# EAGLE board MoueRev3 (EAGLE 7.6.0)
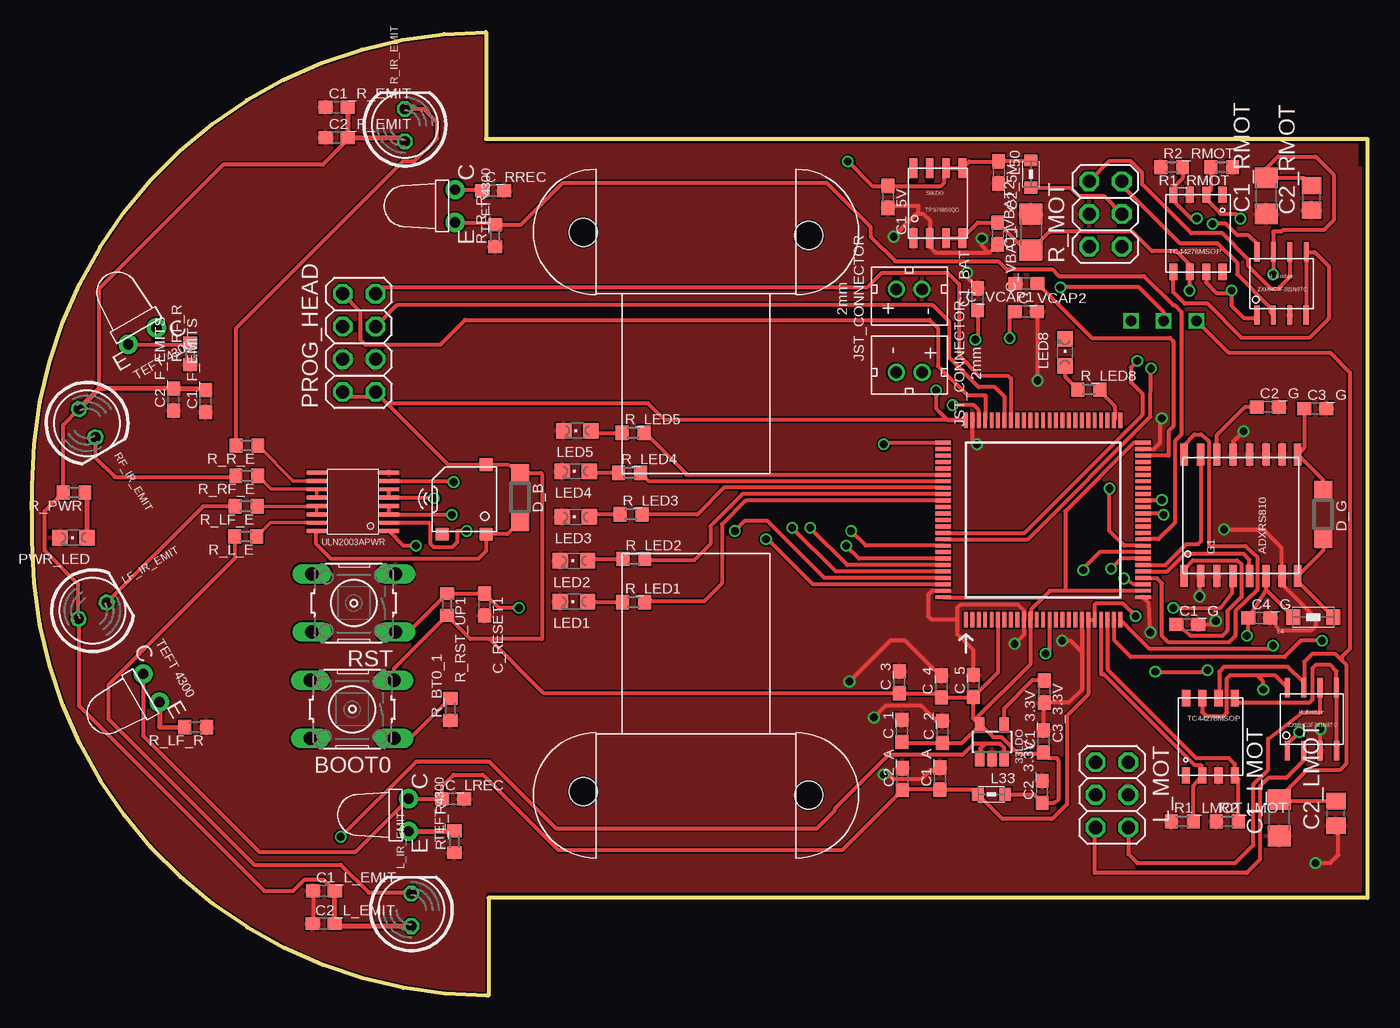
[diagram p0: board, top side]
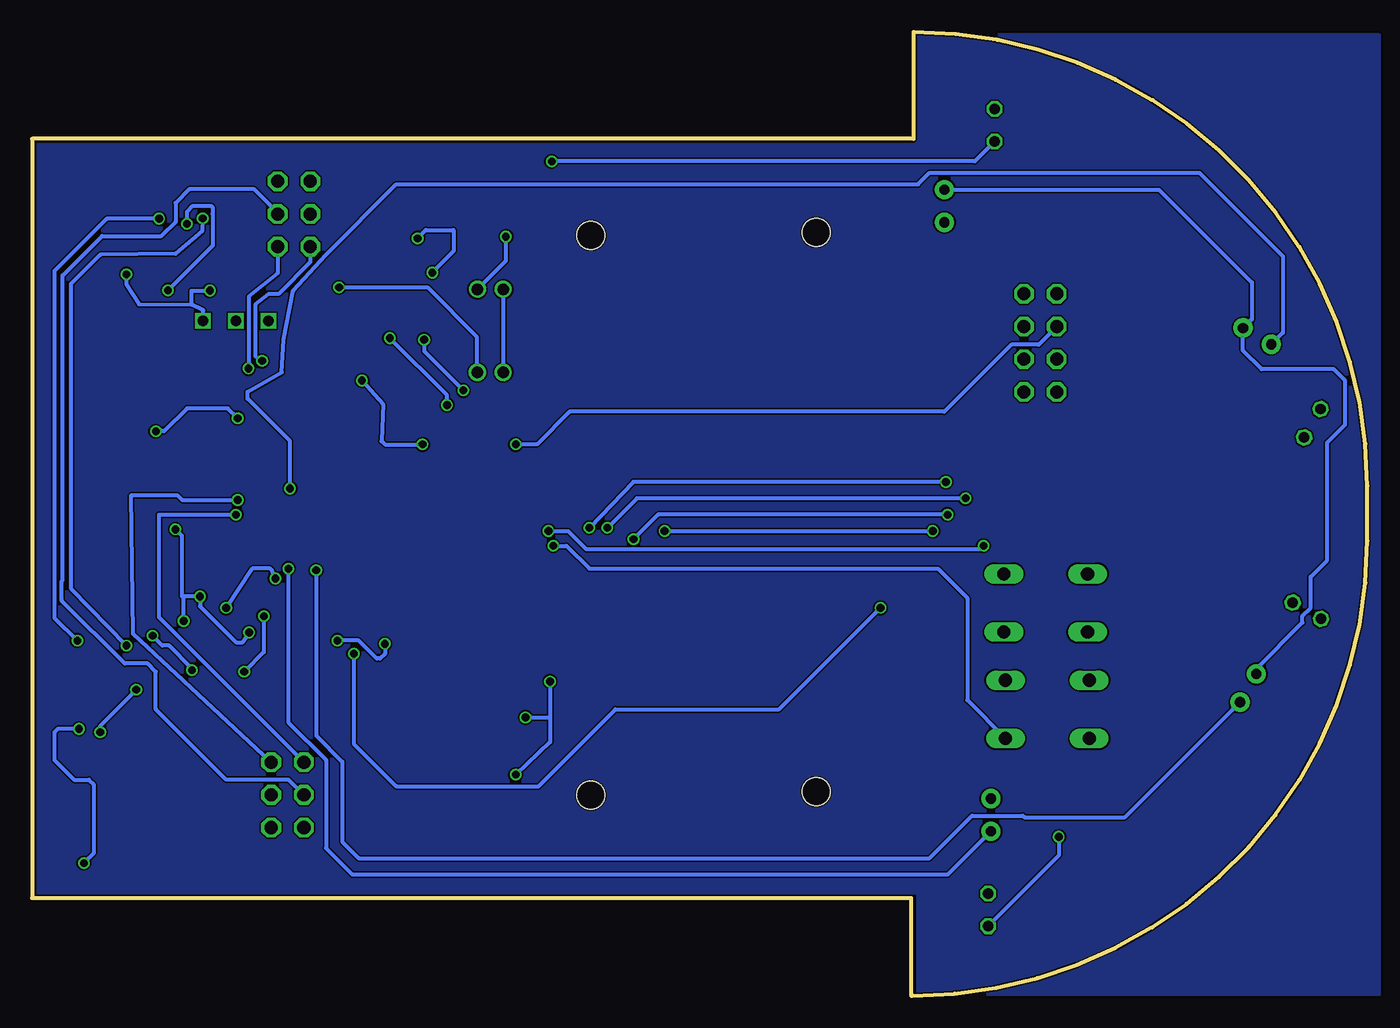
[diagram p1: board, bottom side, seen from below]

Size 103.66 x 74.8 mm. Coordinates in mm from the lower left corner, seen from the top.
Outline: 0,35.31 0,39.57 arc-90 35.23,74.8 35.23,66.52 103.66,66.52 103.66,7.57 35.43,7.57 35.43,0 35.31,0 arc-90 0,35.31
Copper layers (1*16): Top 0.035mm / dielectric 1.5mm / Bottom 0.035mm
Design rules "default *": minimum track width 5mil, minimum drill 20mil, track to track 5mil, track to pad 5mil, pad to pad 5mil, via to via 5mil, smd to smd 5mil, copper to edge 5mil, drill to drill 5mil, minimum pad ring 5mil, minimum via ring 5mil, stop-mask expansion 4mil, vias tented up to drill 0mil, thermal gap 5mil

## Footprints (pad centres in the part's own frame; a part is rotated, then mirrored left to right if it is on the bottom)
SOT23-DBV = smd 0.75 x 1.2: 1 -0.95,-1.3; 2 0,-1.3; 3 0.95,-1.3; 4 0.95,1.3; 5 -0.95,1.3
8-SOIC(SMT) = smd 0.6 x 1.55: EN -0.635,-2.7; GND -1.905,-2.7; IN1 0.635,-2.7; IN2 1.905,-2.7; NC -0.635,2.7; OUT1 1.905,2.7; OUT2 0.635,2.7; PG -1.905,2.7
B3F-10XX = drill 1.016 long: 1 -3.251,2.261; 2 3.251,2.261; 3 -3.251,-2.261; 4 3.251,-2.261
C0603 = smd 1.1 x 1: 1 -0.85,0; 2 0.85,0
C1206 = smd 1.6 x 1.8: 1 -1.4,0; 2 1.4,0
C0805 = smd 1.3 x 1.5: 1 -0.95,0; 2 0.95,0
SOD123 = smd 1.4 x 1.4: A 1.9,0; C -1.9,0
SOIC-16 = smd 1.691 x 0.572: 1 -4.72,4.39; 2 -4.72,3.12; 3 -4.72,1.85; 4 -4.72,0.58; 5 -4.72,-0.69; 6 -4.72,-1.96; 7 -4.72,-3.23; 8 -4.72,-4.43; 9 4.72,-4.43; 10 4.72,-3.23; 11 4.72,-1.96; 12 4.72,-0.69; 13 4.72,0.58; 14 4.72,1.85; 15 4.72,3.12; 16 4.72,4.39
8-SOIC = smd 0.4 x 1.5: N1D/P1D -0.635,-2.45; N1G -1.905,-2.45; N2D/P2D 0.635,2.45; P1G -1.905,2.45; P1S/PS2 -0.635,2.45; P2G 1.905,2.45 | smd 0.42 x 1.5: N1S/N2S 0.635,-2.45; N2G 1.905,-2.45
WE-MI_1206 = smd 1.1 x 1.2: 1 -1.55,0; 2 1.55,0
WE-MI_0805 = smd 0.9 x 1: 1 -1.05,0; 2 1.05,0
LED5MM = drill 0.813 octagon: A -1.27,0; K 1.27,0
2X03 = drill 1.016 octagon: 1 -2.54,-1.27; 2 -2.54,1.27; 3 0,-1.27; 4 0,1.27; 5 2.54,-1.27; 6 2.54,1.27
RECEIVER = drill 0.8 pad 1.5: C 1.27,-0.5; E -1.27,-0.5
CHIPLED_0805 = smd 1.2 x 1.2: A 0,-1.05; C 0,1.05
TC44278MSOP = smd 0.635 x 1.27: GND 0.635,-3; IN_A -0.635,-3; IN_B 1.905,-3; NC1 -1.905,-3; OUT_A -0.635,3; OUT_B 1.905,3; VDD 0.635,3 | smd 0.66 x 1.27: NC2 -1.905,3
2X04 = drill 1.016 octagon: 1 -3.81,-1.27; 2 -3.81,1.27; 3 -1.27,-1.27; 4 -1.27,1.27; 5 1.27,-1.27; 6 1.27,1.27; 7 3.81,-1.27; 8 3.81,1.27
T212031 = drill 0.8 square: 1 0,2.54; 2 0,0; 3 0,-2.54
R0603 = smd 1 x 1.1: 1 -0.85,0; 2 0.85,0
SMT-0540-S-R = smd 1 x 1: + 1.7,-2.7; - 1.7,2.7; M -1.7,-2.7
MOTOR_MOUNT = hole 2.2: -8.75,-1.6; 8.75,-1.85
LQFP100 = smd 1.2 x 0.3: 1 -7.75,6; 2 -7.75,5.5; 3 -7.75,5; 4 -7.75,4.5; 5 -7.75,4; 6 -7.75,3.5; 7 -7.75,3; 8 -7.75,2.5; 9 -7.75,2; 10 -7.75,1.5; 11 -7.75,1; 12 -7.75,0.5; 13 -7.75,0; 14 -7.75,-0.5; 15 -7.75,-1; 16 -7.75,-1.5; 17 -7.75,-2; 18 -7.75,-2.5; 19 -7.75,-3; 20 -7.75,-3.5; 21 -7.75,-4; 22 -7.75,-4.5; 23 -7.75,-5; 24 -7.75,-5.5; 25 -7.75,-6; 51 7.75,-6; 52 7.75,-5.5; 53 7.75,-5; 54 7.75,-4.5; 55 7.75,-4; 56 7.75,-3.5; 57 7.75,-3; 58 7.75,-2.5; 59 7.75,-2; 60 7.75,-1.5; 61 7.75,-1; 62 7.75,-0.5; 63 7.75,0; 64 7.75,0.5; 65 7.75,1; 66 7.75,1.5; 67 7.75,2; 68 7.75,2.5; 69 7.75,3; 70 7.75,3.5; 71 7.75,4; 72 7.75,4.5; 73 7.75,5; 74 7.75,5.5; 75 7.75,6 | smd 0.3 x 1.2: 26 -6,-7.75; 27 -5.5,-7.75; 28 -5,-7.75; 29 -4.5,-7.75; 30 -4,-7.75; 31 -3.5,-7.75; 32 -3,-7.75; 33 -2.5,-7.75; 34 -2,-7.75; 35 -1.5,-7.75; 36 -1,-7.75; 37 -0.5,-7.75; 38 0,-7.75; 39 0.5,-7.75; 40 1,-7.75; 41 1.5,-7.75; 42 2,-7.75; 43 2.5,-7.75; 44 3,-7.75; 45 3.5,-7.75; 46 4,-7.75; 47 4.5,-7.75; 48 5,-7.75; 49 5.5,-7.75; 50 6,-7.75; 76 6,7.75; 77 5.5,7.75; 78 5,7.75; 79 4.5,7.75; 80 4,7.75; 81 3.5,7.75; 82 3,7.75; 83 2.5,7.75; 84 2,7.75; 85 1.5,7.75; 86 1,7.75; 87 0.5,7.75; 88 0,7.75; 89 -0.5,7.75; 90 -1,7.75; 91 -1.5,7.75; 92 -2,7.75; 93 -2.5,7.75; 94 -3,7.75; 95 -3.5,7.75; 96 -4,7.75; 97 -4.5,7.75; 98 -5,7.75; 99 -5.5,7.75; 100 -6,7.75
JST_CONNECTOR_FEMALE = drill 0.889: + 0,1; - 0,-1
ULN2003APWR = smd 1.55 x 0.3: 1B -2.8,2.275; 1C 2.8,2.275; 2B -2.8,1.625; 2C 2.8,1.625; 3B -2.8,0.975; 3C 2.8,0.975; 4B -2.8,0.325; 4C 2.8,0.325; 5B -2.8,-0.325; 5C 2.8,-0.325; 6B -2.8,-0.975; 6C 2.8,-0.975; 7B -2.8,-1.625; 7C 2.8,-1.625; COM 2.8,-2.275; GND -2.8,-2.275

## Placement (x,y rotation side)
33LDO  TPS73633DBVR  [SOT23-DBV]  74.52,19.7 0 top
50LDO  TPS76850QD  [8-SOIC(SMT)]  70.32,61.53 0 top
BOOT0  [B3F-10XX]  24.84,22.22 180 top
C1_3.3V  10uF  [C0603]  78.52,19.74 90 top
C1_5V  100uF  [C0603]  66.45,62.02 270 top
C1_A  1uF  [C0603]  70.48,16.84 90 top
C1_BAT  4.7uF  [C0603]  73.41,54.07 90 top
C1_F_EMITS  4.7uF  [C0603]  13.47,46.16 90 top
C1_G  1uF  [C0603]  89.67,28.82 0 top
C1_L_EMIT  4.7uF  [C0603]  22.65,8.12 0 top
C1_LMOT  100uF  [C1206]  96.83,13.8 90 top
C1_R_EMIT  4.7uF  [C0603]  23.64,68.99 0 top
C1_RMOT  100uF  [C1206]  95.82,62.09 90 top
C2_3.3V  .1uF  [C0603]  78.41,15.82 90 top
C2_5V  .1uF  [C0603]  75.03,63.91 270 top
C2_A  100nF  [C0603]  67.56,16.81 90 top
C2_F_EMITS  .1uF  [C0603]  10.97,46.27 90 top
C2_G  1uF  [C0603]  95.92,45.71 0 top
C2_L_EMIT  .1uF  [C0603]  22.64,5.59 0 top
C2_LMOT  .1uF  [C0805]  101.22,14.14 90 top
C2_R_EMIT  .1 uF  [C0603]  23.65,66.62 0 top
C2_RMOT  .1uF  [C0805]  99.32,61.93 90 top
C3_3.3V  100nF  [C0603]  78.59,23.6 270 top
C3_G  100nF  [C0603]  99.61,45.58 0 top
C4_G  1uF  [C0603]  95.28,29.33 0 top
C_1  100nF  [C0603]  67.53,20.55 90 top
C_2  100nF  [C0603]  70.66,20.47 90 top
C_3  100nF  [C0603]  67.32,24.33 90 top
C_4  100nF  [C0603]  70.58,23.99 90 top
C_5  100nF  [C0603]  73.08,24.04 90 top
C_LREC  0.1uF  [C0603]  32.67,15.27 0 top
C_RESET1  0.1 uF  [C0603]  35.13,30.35 270 top
C_RREC  0.1 uF  [C0603]  35.8,62.5 0 top
C_VBAT1  .1uF  [C0603]  74.96,59.17 270 top
C_VBAT2  100uF  [C1206]  77.55,59.28 90 top
C_VCAP1  2.2uF  [C0603]  77.18,55.28 180 top
C_VCAP2  2.2uF  [C0603]  77.14,53.09 0 top
D_B  25V  [SOD123]  37.87,38.69 270 top
D_G  >24V  [SOD123]  100.25,37.37 270 top
G1  ADXRS810  [SOIC-16]  93.82,37.29 90 top
HB_L  ZXMHC3F381N8TC  [8-SOIC]  99.35,21.46 0 top
HB_R  ZXMHC3F381N8TC  [8-SOIC]  97,55.29 0 top
L4  560uH  [WE-MI_1206]  99.47,29.39 0 top
L33  10uH  [WE-MI_0805]  74.48,15.63 180 top
L50  10uH  [WE-MI_0805]  77.54,63.78 270 top
L_IR_EMIT  5mm  [LED5MM]  29.44,6.65 90 top
L_MOT  [2X03]  83.83,15.58 270 top
L_REC  RECEIVER  [RECEIVER]  28.72,14.02 90 top
LED1  [CHIPLED_0805]  42.07,30.6 90 top
LED2  [CHIPLED_0805]  42.07,33.75 90 top
LED3  [CHIPLED_0805]  42.19,37.17 90 top
LED4  [CHIPLED_0805]  42.19,40.71 90 top
LED5  [CHIPLED_0805]  42.32,43.87 90 top
LED8  [CHIPLED_0805]  80.19,49.94 0 top
LF_IR_EMIT  5mm  [LED5MM]  4.69,29.88 30 top
LF_REC  RECEIVER  [RECEIVER]  8.81,23.62 120 top
MOS_L  TC44278MSOP  [TC44278MSOP]  91.47,20.09 0 top
MOS_R  TC44278MSOP  [TC44278MSOP]  90.51,59.19 180 top
PROG_HEAD  [2X04]  25.38,50.68 90 top
PWR_LED  [CHIPLED_0805]  3.21,35.56 90 top
PWR_SWITCH  T212031  [T212031]  87.85,52.39 90 top
R1_LMOT  47k  [R0603]  89.3,13.52 0 top
R1_RMOT  47k  [R0603]  92.35,64.32 180 top
R2_LMOT  47k  [R0603]  92.8,13.52 0 top
R2_RMOT  47k  [R0603]  88.47,64.33 0 top
R_BT0_1  47k  [R0603]  32.46,22.22 90 top
R_IR_EMIT  5mm  [LED5MM]  28.94,67.58 90 top
R_L_E  6 ohm  [R0603]  16.58,35.65 180 top
R_L_R  1.8k ohm  [R0603]  32.78,11.95 90 top
R_LED1  1k  [R0603]  46.68,30.54 0 top
R_LED2  1k  [R0603]  46.71,33.89 0 top
R_LED3  1k  [R0603]  46.48,37.37 0 top
R_LED4  1k  [R0603]  46.37,40.59 0 top
R_LED5  1k  [R0603]  46.66,43.69 0 top
R_LED8  1k  [R0603]  82.04,47.07 0 top
R_LF_E  10 ohm  [R0603]  16.62,37.99 180 top
R_LF_R  1.8k ohm  [R0603]  12.69,20.84 180 top
R_MOT  [2X03]  83.33,60.69 90 top
R_PWR  200 Ohm  [R0603]  3.25,39.06 180 top
R_R_E  6 ohm  [R0603]  16.68,42.71 180 top
R_R_R  1.8k ohm  [R0603]  35.93,59.02 90 top
R_REC  RECEIVER  [RECEIVER]  32.33,61.3 90 top
R_RF_E  10 ohm  [R0603]  16.67,40.36 180 top
R_RF_R  1.8k ohm  [R0603]  12.28,49.83 90 top
R_RST_UP1  47k  [R0603]  32.21,30.35 270 top
RF_IR_EMIT  5mm  [LED5MM]  4.26,44.44 300 top
RF_REC  RECEIVER  [RECEIVER]  8.31,51.63 30 top
RST  [B3F-10XX]  24.97,30.48 180 top
SPK1  SMT-0540-S-R  [SMT-0540-S-R]  33.54,38.52 0 top
U$1  MOTOR  [MOTOR_MOUNT]  51.53,57.42 180 top
U$2  MOTOR  [MOTOR_MOUNT]  51.53,17.42 0 top
U$3  STM32F746VG  [LQFP100]  78.49,36.93 90 top
U$7  JST_CONNECTOR_FEMALE  [JST_CONNECTOR_FEMALE]  68.09,48.39 270 top
U$8  JST_CONNECTOR_FEMALE  [JST_CONNECTOR_FEMALE]  68.09,54.85 90 top
U$9  ULN2003APWR  [ULN2003APWR]  24.9,38.34 180 top

## Library data of the parts
33LDO = TPSRegulators; AVAILABILITY: Good; DESCRIPTION: Single Output LDO, 400mA, Adj.(1.2 to 5.5V), Cap free, Low Noise, Reverse Current Protection 5-SOT-23 -40 to 125; MF: Texas Instruments; MP: TPS73633DBVR; PACKAGE: SOT-23 Texas Instruments; PRICE: 1.34 USD
50LDO = TPSRegulators
BOOT0 RST = switch-omron; MPN: B3F-1000; OC_FARNELL: 176432; OC_NEWARK: 36M3542
C1_3.3V C1_5V C1_F_EMITS C1_L_EMIT C1_R_EMIT C2_3.3V C2_5V C2_F_EMITS C2_L_EMIT C2_R_EMIT C3_3.3V C_LREC C_RESET1 C_RREC C_VBAT1 C_VBAT2 R1_LMOT R1_RMOT R2_LMOT R2_RMOT R_BT0_1 R_L_E R_L_R R_LED1-R_LED5 R_LED8 R_LF_E R_LF_R R_PWR R_R_E R_R_R R_RF_E R_RF_R R_RST_UP1 = resistor
C1_A C1_BAT C1_G C1_LMOT C1_RMOT C2_A C2_G C2_LMOT C2_RMOT C3_G C4_G C_1-C_5 C_VCAP1 C_VCAP2 = rcl
D_B D_G = diode
G1 = gyroscope
HB_L HB_R = MMHbridge
L4 L33 L50 = EagleLibrary_Wuerth_Elektronik_eiSos_rev16a
L_IR_EMIT LED1-LED5 LED8 LF_IR_EMIT PWR_LED R_IR_EMIT RF_IR_EMIT = led
L_MOT PROG_HEAD R_MOT = pinhead
L_REC LF_REC R_REC RF_REC = sfh4550 & teft4300
MOS_L MOS_R = MMmosfet
PWR_SWITCH = GCswitch
SPK1 = SMT-0540-S-R; AVAILABILITY: Good; DESCRIPTION: Audio Indicator Transducer Electromagnetic 3Vp-p 100mA Solder Pad 2Vp-p 3500Hz to 4500Hz Surface Mount; MF: PUI Audio; MP: SMT-0540-S-R; PACKAGE: None; PRICE: 2.42 USD
U$1 U$2 = mounts
U$3 = MCU
U$7 U$8 = JST_CONNECTOR_FEMALE. through hole
U$9 = ULN2003APWR

## Nets
3.3V: 33LDO.5 BOOT0.3 C1_3.3V.1 C1_BAT.1 C2_3.3V.1 C_1.1 C_2.1 C_3.1 C_4.1 C_5.1 D_B.C L33.1 PROG_HEAD.1 PROG_HEAD.2 R_RST_UP1.2 SPK1.- U$3.6 U$3.11 U$3.27 U$3.50 U$3.75 U$3.100
5V: 33LDO.1 33LDO.3 50LDO.OUT1 50LDO.OUT2 C1_5V.1 C1_F_EMITS.2 C1_L_EMIT.2 C1_R_EMIT.2 C2_5V.1 C2_F_EMITS.2 C2_L_EMIT.2 C2_R_EMIT.2 L50.1 L_IR_EMIT.A LF_IR_EMIT.A R_IR_EMIT.A R_PWR.2 RF_IR_EMIT.A
A3.3V: C1_A.1 C2_A.1 C4_G.1 C_LREC.1 C_RREC.1 G1.6 L4.1 L33.2 L_REC.C LF_REC.C R_REC.C RF_REC.C U$3.20 U$3.21
A5.0V: L50.2 L_MOT.3 R_MOT.3
BOOT0: BOOT0.1 R_BT0_1.2 U$3.94
BUZZER: U$3.92 U$9.1B
G_CS: G1.4 U$3.28
G_MISO: G1.5 U$3.30
G_MOSI: G1.15 U$3.31
G_SCLK: G1.16 U$3.29
L_EMITTER: U$3.96 U$9.5B U$9.6B
LED1: R_LED1.2 U$3.85
LED2: R_LED2.2 U$3.84
LED3: R_LED3.2 U$3.83
LED4: R_LED4.2 U$3.82
LED5: R_LED5.2 U$3.81
LED9: R_LED8.2 U$3.52
LEFT_REC: L_REC.E R_L_R.2 U$3.32
LENCA: L_MOT.1 U$3.39
LENCB: L_MOT.2 U$3.41
LF_EMITTER: U$3.95 U$9.7B
LF_REC: LF_REC.E R_LF_R.2 U$3.33
LPWMA: MOS_L.IN_A R1_LMOT.2 U$3.22
LPWMB: MOS_L.IN_B R2_LMOT.2 U$3.23
N$1: PWR_LED.A R_PWR.1
N$2: 33LDO.4 C3_3.3V.1
N$3: 33LDO.2 50LDO.EN 50LDO.GND C1_3.3V.2 C1_5V.2 C1_A.2 C1_BAT.2 C1_F_EMITS.1 C1_G.2 C1_L_EMIT.1 C1_LMOT.1 C1_R_EMIT.1 C1_RMOT.1 C2_3.3V.2 C2_5V.2 C2_A.2 C2_F_EMITS.1 C2_G.2 C2_L_EMIT.1 C2_LMOT.1 C2_R_EMIT.1 C2_RMOT.1 C3_3.3V.2 C3_G.2 C4_G.2 C_1.2 C_2.2 C_3.2 C_4.2 C_5.2 C_LREC.2 C_RESET1.2 C_RREC.2 C_VBAT1.2 C_VBAT2.2 C_VCAP1.2 C_VCAP2.2 G1.2 G1.3 G1.7 G1.10 G1.11 G1.12 G1.13 HB_L.N1S/N2S HB_R.N1S/N2S L_MOT.4 LED1.C LED2.C LED3.C LED4.C LED5.C MOS_L.GND MOS_R.GND PROG_HEAD.3 PROG_HEAD.4 PWR_LED.C R1_LMOT.1 R1_RMOT.1 R2_LMOT.1 R2_RMOT.1 R_BT0_1.1 R_L_R.1 R_LF_R.1 R_MOT.4 R_R_R.1 R_RF_R.1 RST.3 U$3.10 U$3.19 U$3.26 U$3.49 U$3.74 U$3.99 U$8.- U$9.GND
N$4: R_L_E.1 U$9.2C
N$5: HB_L.N1G HB_L.P1G MOS_L.OUT_A
N$6: HB_L.N2G HB_L.P2G MOS_L.OUT_B
N$7: HB_R.N1G HB_R.P1G MOS_R.OUT_A
N$8: HB_L.N1D/P1D L_MOT.5
N$9: U$7.- U$8.+
N$10: C1_G.1 G1.1
N$11: HB_L.N2D/P2D L_MOT.6
N$12: LED8.C
N$13: R_R_E.1 U$9.7C
N$14: D_G.A G1.8 L4.2
N$16: LED8.A R_LED8.1
N$18: HB_R.N2G HB_R.P2G MOS_R.OUT_B
N$19: HB_R.N1D/P1D R_MOT.5
N$20: C3_G.1 D_G.C G1.9
N$21: HB_R.N2D/P2D R_MOT.6
N$23: R_RF_E.2 RF_IR_EMIT.K
N$24: R_LF_E.1 U$9.3C U$9.4C
N$25: R_IR_EMIT.K R_R_E.2
N$26: L_IR_EMIT.K R_L_E.2
N$27: R_RF_E.1 U$9.5C U$9.6C
N$28: LF_IR_EMIT.K R_LF_E.2
N$29: D_B.A SPK1.+ U$9.1C
N$31: PWR_SWITCH.2 U$7.+
N$35: C2_G.1 G1.14
N$40: LED1.A R_LED1.1
N$41: LED2.A R_LED2.1
N$42: LED3.A R_LED3.1
N$43: LED4.A R_LED4.1
N$44: LED5.A R_LED5.1
N$56: C_VCAP2.1 U$3.73
N$57: C_VCAP1.1 U$3.48
R_EMITTER: U$3.98 U$9.3B U$9.4B
RENCA: R_MOT.1 U$3.91
RENCB: R_MOT.2 U$3.90
RESET: C_RESET1.1 R_RST_UP1.1 RST.1 U$3.14
RF_EMITTER: U$3.97 U$9.2B
RF_REC: R_RF_R.2 RF_REC.E U$3.34
RIGHT_REC: R_R_R.2 R_REC.E U$3.35
RPWMA: MOS_R.IN_A R1_RMOT.2 U$3.24
RPWMB: MOS_R.IN_B R2_RMOT.2 U$3.25
RX: PROG_HEAD.5 U$3.69
SW1: U$3.63
SW2: U$3.62
SWCLK: PROG_HEAD.6 U$3.76
SWDIO: PROG_HEAD.8 U$3.72
TX: PROG_HEAD.7 U$3.68
V_BAT: 50LDO.IN1 50LDO.IN2 C1_LMOT.2 C1_RMOT.2 C2_LMOT.2 C2_RMOT.2 C_VBAT1.1 C_VBAT2.1 HB_L.P1S/PS2 HB_R.P1S/PS2 MOS_L.VDD MOS_R.VDD PWR_SWITCH.3

## Tracks (layer width: path | path; a pad name or v marks a point on that pad's centre or on a via)
3.3V  (via drill 0.6)
  Top 0.305: 27.02,46.5 PROG_HEAD.1 27.54,45.97 47.83,45.97 49.12,44.68 U$3.75 72.46,44.7 71.07,44.7 70.18,45.59 v70.18,46.99 | 27.02,46.5 32.3,41.22 SPK1.- 36.98,41.22 D_B.C 39.5,40.59 39.57,40.51 39.57,27.69 35.51,27.69 | 27.02,46.5 24.48,46.5 PROG_HEAD.2 24.21,46.86 | C_1.1 67.61,19.62 C_2.1 72.2,19.62 33LDO.5 | L33.1 77.75,15.63 C2_3.3V.1 79.31,14.97 79.71,15.24 79.71,18.16 79.58,18.41 78.99,18.41 C1_3.3V.1 78.43,18.8 76.53,18.8 75.26,20.07 74.63,20.07 73.7,21 33LDO.5 | 73.03,23.14 C_4.1 70.25,23.48 C_3.1 39.72,23.48 35.51,27.69 | 73.03,23.14 C_5.1 74.99,25.1 U$3.6 | 73.03,23.14 73.03,21.53 73.17,21.4 | 73.17,21.4 33LDO.5 | 73.17,21.4 77.49,25.72 U$3.11 77.55,29.24 77.55,29.97 78.5,30.93 | U$3.27 80.21,31.43 | 80.21,31.43 79,31.43 78.5,30.93 | BOOT0.3 28.09,25.39 R_RST_UP1.2 34.02,27.69 35.51,27.69 | U$3.50 85.55,42.93 80.21,37.59 80.21,31.43 | U$3.100 78.5,30.93 | C1_BAT.1 73.41,51.11 v73.23,50.93
  Bottom 0.305: v73.23,50.93 73.23,50.04 v70.18,46.99
5V  (via drill 0.6)
  Top 0.305: RF_IR_EMIT.A 2.4,44.31 R_PWR.2 0.97,37.62 0.97,34.54 3.59,31.92 LF_IR_EMIT.A 3.63,29.2 3.63,22.48 17.99,8.12 20.26,8.12 21.16,9.02 22.6,9.02 C1_L_EMIT.2 | C2_R_EMIT.2 24.49,66.45 22.56,64.52 14.81,64.52 5.16,54.86 5.16,47.37 5.41,47.12 | L50.1 75.1,64.83 C2_5V.1 72.76,64.76 50LDO.OUT1 50LDO.OUT2 70.82,64.09 70.82,63.12 70.56,62.87 C1_5V.1 65.23,62.87 v63.32,64.77 | 33LDO.3 75.47,19.22 75.13,19.56 73.99,19.56 | 73.99,19.56 73.61,19.18 73.61,18.43 33LDO.1 | 73.99,19.56 73.1,19.56 72.21,18.67 66.5,18.67 62.31,14.48 62.31,14.35 60.91,12.95 40.72,12.95 35.51,18.16 29.79,18.16 v23.95,12.32
  Top 0.406: L_IR_EMIT.A 23.69,5.38 C2_L_EMIT.2 23.49,8.1 C1_L_EMIT.2 | C1_F_EMITS.2 13.36,47.12 C2_F_EMITS.2 5.41,47.12 5.21,47.12 RF_IR_EMIT.A | C1_R_EMIT.2 C2_R_EMIT.2 28.64,66.62 R_IR_EMIT.A
  Bottom 0.305: R_IR_EMIT.A 30.48,64.77 v63.32,64.77 | v23.95,12.32 23.95,10.87 L_IR_EMIT.A
A3.3V  (via drill 0.6)
  Top 0.305: R_REC.C 34.87,62.57 C_RREC.1 | L4.1 95.78,31.53 G1.6 95.78,31.44 C4_G.1 94.44,27.94 v94.31,27.94 | LF_REC.C 8.61,20.17 17.6,11.18 25.11,11.18 L_REC.C 31.8,15.29 C_LREC.1 31.82,16.25 32.72,17.14 35,17.14 40.84,11.3 62.9,11.3 C2_A.1 67.59,15.99 C1_A.1 73.06,15.99 L33.2 75.34,13.72 79.2,13.72 80.34,14.86 80.34,21.72 81.99,23.36 U$3.20 U$3.21 82.49,30.34 82.63,30.48 84.66,30.48 v85.67,29.46 | v87.2,25.15 91.14,25.15 v91.26,25.27
  Bottom 0.305: R_REC.C 16.17,62.57 8.97,55.37 8.97,52.52 RF_REC.C 9.66,50.09 8.2,48.64 2.62,48.64 1.73,47.75 1.73,44.32 3.12,42.93 3.12,33.78 4.39,32.51 4.39,30.1 5.03,29.46 5.03,28.96 8.61,25.37 LF_REC.C | v85.67,29.46 85.67,26.67 v87.2,25.15 | v91.26,25.27 91.26,25.4 93.04,27.18 93.55,27.18 v94.31,27.94
A5.0V
  Top 0.305: L50.2 80.6,62.73 81.23,62.1 83.19,62.1 R_MOT.3
  Bottom 0.305: L_MOT.3 83.75,16.76 88.6,16.76 94.06,22.22 94.06,25.15 94.69,25.78 96.47,25.78 101.35,30.66 101.35,32.21 101.3,32.26 101.3,55.91 98.22,58.98 93.62,58.98 92.53,60.07 92.53,61.54 91.47,62.61 86.41,62.61 84.6,60.8 R_MOT.3
BOOT0  (via drill 0.6)
  Top 0.305: BOOT0.1 29.35,19.96 R_BT0_1.2 | U$3.94 64.19,33.93 v63.2,34.92
  Bottom 0.305: v63.2,34.92 62.18,34.92 60.4,33.15 33.35,33.15 31.06,30.86 31.06,22.94 BOOT0.1
BUZZER  (via drill 0.6)
  Top 0.305: U$3.92 64.72,34.93 v63.58,36.07 | v29.79,34.92 28.84,34.92 U$9.1B
  Bottom 0.305: v63.58,36.07 62.05,36.07 60.66,34.67 30.05,34.67 v29.79,34.92
G_CS  (via drill 0.6)
  Top 0.305: U$3.28 85.5,31.93 v84.79,32.39 | v88.6,30.1 92.28,30.1 93.17,31.24 93.17,32.5 G1.4
  Bottom 0.305: v84.79,32.39 85.04,33.02 85.17,33.15 86.56,33.15 v88.6,30.1
G_MISO
  Top 0.305: G1.5 94.51,33.83 94.06,34.29 89.48,34.29 88.09,32.89 86.27,32.89 U$3.30
G_MOSI
  Top 0.305: U$3.31 87.99,33.43 89.61,35.05 90.5,35.05 90.75,35.31 90.75,41.96 G1.15
G_SCLK
  Top 0.305: G1.16 89.43,42.75 90.25,43.56 90.75,43.56 91.34,43.05 91.36,40.28 91.36,34.95 91.39,34.92 94.18,34.92 95.12,34.04 95.12,31.5 93.42,29.85 93.42,27.94 92.91,27.43 88.21,27.43 87.71,27.94 87.71,32 87.33,32.39 86.28,32.39 U$3.29
GND
  pour Bottom: -0.94,74.55 35,74.55 35,66.04 103.2,66.04 103.2,8 34.87,8 34.87,0.13 -0.94,0.13
L_EMITTER  (via drill 0.6)
  Top 0.305: U$9.6B U$9.5B 31.13,38.67 v31.19,38.61 | U$3.96 62.4,32.93 v59,36.32
  Bottom 0.305: v31.19,38.61 56.72,38.61 v59,36.32
LED1
  Top 0.305: U$3.85 55.4,38.43 53.54,36.58 53.54,32 52.15,30.61 47.59,30.61 R_LED1.2
LED2
  Top 0.305: U$3.84 55.13,38.93 52.65,36.45 52.65,35.05 51.38,33.78 47.67,33.78 R_LED2.2
LED3
  Top 0.305: U$3.83 53.73,39.43 51.64,37.34 47.37,37.34 R_LED3.2
LED4
  Top 0.305: U$3.82 47.89,39.93 R_LED4.2
LED5
  Top 0.305: U$3.81 50.77,40.43 50.77,40.52 47.96,43.33 47.87,43.33 R_LED5.2
LED9
  Top 0.305: R_LED8.2 82.89,46.93 84.05,45.77 84.05,44.74 U$3.52
LEFT_REC  (via drill 0.6)
  Top 0.305: U$3.32 84.55,33.93 v83.77,33.15
  Top 0.406: L_REC.E 32.74,12.75 R_L_R.2
  Bottom 0.305: v83.77,33.15 83.77,21.21 80.85,18.29 80.85,11.43 78.82,9.4 32.58,9.4 L_REC.E
LENCA  (via drill 0.6)
  Top 0.305: v87.83,37.34 87.54,37.43 U$3.39
  Bottom 0.305: L_MOT.1 93.8,29.36 93.8,37.34 v87.83,37.34
LENCB  (via drill 0.6)
  Top 0.305: v87.71,38.48 87.65,38.43 U$3.41
  Bottom 0.305: L_MOT.2 95.83,28.09 95.96,38.86 92.41,38.86 92.02,38.48 v87.71,38.48
LF_EMITTER  (via drill 0.6)
  Top 0.305: U$3.95 63.29,33.43 v60.4,36.32 | U$9.7B 32.63,39.97 v32.72,39.88
  Bottom 0.305: v32.72,39.88 56.97,39.88 v60.4,36.32
LF_REC  (via drill 0.6)
  Top 0.305: U$3.33 82.89,34.43 81.61,33.15 v81.61,33.02
  Top 0.406: LF_REC.E 9.88,20.84 R_LF_R.2
  Bottom 0.305: v81.61,33.02 81.61,20.19 79.58,18.16 79.58,11.94 78.31,10.67 33.99,10.67 30.68,13.97 26.75,13.97 26.62,13.84 18.81,13.84 LF_REC.E
LPWMA
  Top 0.305: R1_LMOT.2 90.15,16.28 MOS_L.IN_A 90.75,17.18 90.75,17.91 90.25,17.91 83.21,24.94 82.99,24.94 U$3.22
LPWMB
  Top 0.305: R2_LMOT.2 93.65,16.82 MOS_L.IN_B 93.38,17.95 92.91,18.41 90.37,18.41 83.52,25.27 83.52,29.15 U$3.23
N$1
  Top 0.406: PWR_LED.A 4.26,38.89 R_PWR.1
N$2
  Top 0.305: 33LDO.4 75.47,22.31 77.67,24.51 78.52,24.51 C3_3.3V.1
N$3  (via drill 0.6)
  Top 0.305: v66.88,58.93 68.66,60.71 68.78,60.71 | 68.78,60.71 69.16,60.71 69.68,60.19 50LDO.EN 69.68,58.16 70.18,57.66 74.29,57.66 | C_VCAP2.2 78.05,53.03 v78.05,47.75 | v73.36,42.8 72.99,43.17 U$3.74 | C_VBAT1.2 74.29,57.66 | C1_5V.2 66.63,61.34 68.78,61.34 68.78,60.71 | 74.29,57.66 73.74,58.22 v73.74,58.8 | v72.59,56.13 72.59,55.73 C1_BAT.2 | U$3.49 87.08,42.43 87.58,42.93 87.58,44.7 v87.71,44.83 | v94.06,43.81 93.24,43 G1.13 | U$3.19 81.48,26.67 | 81.48,26.67 81.48,23.75 80.48,22.75 C3_3.3V.2 78.52,22.68 C1_3.3V.2 | v76.28,27.31 76.99,28.02 U$3.10 77.04,29.23 77.04,29.85 76.53,30.35 72.09,30.35 71.83,30.1 71.83,29.08 | v79.96,27.56 80.59,27.56 81.48,26.67 | HB_L.N1S/N2S 99.99,20.66 v100.03,20.7 | v99.64,10.29 100.79,10.29 101.42,10.92 101.42,12.99 C2_LMOT.1 | C_5.2 73.08,26.82 71.83,28.07 71.83,29.08 | U$3.99 69.86,31.43 69.55,31.11 69.55,29.46 69.8,29.21 71.7,29.21 71.83,29.08 | C1_L_EMIT.1 21.8,5.6 C2_L_EMIT.1 | C_4.2 70.48,24.84 67.77,27.56 66.62,27.56 v63.45,24.38 | v66.12,17.14 66.37,17.02 66.62,17.02 66.8,16.84 69.06,16.84 69.72,17.5 70.29,17.5 C1_A.2 | C_2.2 70.2,21.32 69.04,22.48 66.24,22.48 v65.35,21.59 | G1.2 90.63,32.57 v90.63,30.99 | v92.53,36.2 95.58,36.2 96.98,34.8 96.98,32.65 G1.7 97.05,31.93 99.64,29.34 99.64,28.7 99.26,28.32 96.88,28.32 C4_G.2 | v86.82,28.19 86.69,30.48 U$3.26 | C1_G.2 91.76,28.82 v91.9,29.08
  Bottom 0.305: U$8.- 66.88,57.06 v66.88,58.93 | v78.05,47.75 76.43,45.92 76.53,43.05 76.28,42.8 v73.36,42.8 | v73.74,58.8 73.1,59.44 70.94,59.44 70.94,57.78 v72.59,56.13 | v87.71,44.83 88.47,45.59 91.64,45.59 93.42,43.81 v94.06,43.81 | v76.28,27.31 76.28,26.54 76.66,26.16 76.91,26.16 78.31,27.56 v79.96,27.56 | v100.03,20.7 101.68,20.7 101.93,20.45 101.93,18.29 100.41,16.76 99.26,16.76 98.88,16.38 98.88,11.05 v99.64,10.29 | v63.45,24.38 63.45,21.59 | 63.45,21.59 63.45,19.68 v66.12,17.14 | v65.35,21.59 63.45,21.59 | 91.9,30.99 v90.63,30.99 90.63,30.23 87.83,27.43 87.33,27.43 v86.82,28.19 | v92.53,36.2 92.02,35.69 92.02,30.99 91.9,30.99 | v91.9,29.08 91.9,30.99
  pour Top: -1.07,74.8 35,74.8 35,66.04 102.82,66.04 102.82,64.26 103.07,64.26 103.07,8.13 35.13,8.13 35.13,-0.13 -1.07,-0.13
N$4
  Top 0.254: U$9.2C 18.5,36.72 R_L_E.1
N$5  (via drill 0.6)
  Top 0.305: MOS_L.OUT_A 90.84,22.01 91.14,21.72 92.53,21.72 92.76,21.97 92.76,24.64 93.04,24.89 95.07,24.89 | 95.07,24.89 96.47,24.89 HB_L.P1G | HB_L.N1G 97.45,19.52 v98.37,20.45 | v95.58,23.75 95.58,24.38 95.07,24.89
  Bottom 0.305: v98.37,20.45 98.37,20.96 v95.58,23.75
N$6
  Top 0.305: HB_L.N2G HB_L.P2G 101.26,25.18 100.79,25.65 99.64,25.65 99.39,25.4 99.39,22.99 99.14,22.73 93.74,22.73 MOS_L.OUT_B
N$7  (via drill 0.6)
  Top 0.305: HB_R.P1G 95.1,58.37 94.44,59.03 93.57,59.03 92.68,59.92 v91.64,59.92 | HB_R.N1G 94.86,52.6 94.08,52.6 93.12,53.57 v93.12,54.76 92.91,54.56 91.95,54.56 91.15,55.36 MOS_R.OUT_A
  Bottom 0.305: v93.12,54.76 89.64,58.24 89.64,60.68 89.66,60.71 89.66,61.21 89.76,61.32 91.19,61.32 91.64,60.86 v91.64,59.92
N$8
  Top 0.305: HB_L.N1D/P1D 98.72,18.25 97.36,16.89 95.96,16.89 95.33,16.26 95.33,10.54 94.31,9.53 82.5,9.53 82.5,12.98 L_MOT.5
N$9
  Bottom 0.305: U$8.+ U$7.-
N$10
  Top 0.305: G1.1 89.43,33.09 90.12,33.78 93.55,33.78 93.88,33.5 93.88,30.94 92.79,29.85 92.79,28.32 92.41,27.94 89.95,27.94 C1_G.1
N$11
  Top 0.305: L_MOT.6 85.1,10.98 85.8,10.29 93.42,10.29 94.82,11.68 94.82,16.38 95.96,17.53 95.96,19.94 98.63,21.97 100.03,21.97 100.03,23.82 HB_L.N2D/P2D
N$13
  Top 0.254: U$9.7C 20.27,39.97 R_R_E.1
N$14
  Top 0.305: D_G.A 100.25,34.57 G1.8 98.25,32.16 L4.2
N$16
  Top 0.305: LED8.A 80.19,48.07 R_LED8.1
N$18
  Top 0.305: HB_R.N2G HB_R.P2G 99.56,57.74 100.66,56.64 100.66,52.58 99.14,51.05 93.93,51.05 91.26,53.72 89.48,53.72 88.6,54.61 MOS_R.OUT_B
N$19
  Top 0.305: R_MOT.5 84.6,62.92 89.1,58.42 92.02,58.42 93.55,56.9 93.55,56.01 96.09,53.47 96.09,53.12 HB_R.N1D/P1D
N$20
  Top 0.305: D_G.C 100.25,40.01 G1.9 98.76,42.52 C3_G.1
N$21
  Top 0.305: HB_R.N2D/P2D 97.64,55.78 96.72,54.86 96.22,54.86 94.44,56.64 94.44,57.15 92.41,59.18 89.99,59.18 86.18,62.99 86.18,63.88 85.29,64.77 83.6,64.77 R_MOT.6
N$23
  Top 0.305: RF_IR_EMIT.K 4.9,41.79 6.43,40.26 15.71,40.26 R_RF_E.2
N$24
  Top 0.254: R_LF_E.1 22.07,37.99 U$9.4C U$9.3C
N$25
  Top 0.305: R_R_E.2 15.83,51.82 28.78,64.77 29.67,64.77 31.45,66.55 31.45,67.82 30.43,68.83 28.96,68.83 R_IR_EMIT.K
N$26
  Top 0.305: R_L_E.2 15.73,33.95 5.92,24.13 5.92,21.46 17.22,10.16 23.95,10.16 26.11,8 29.36,8 L_IR_EMIT.K
N$27
  Top 0.254: U$9.5C U$9.6C 18.56,39.31 R_RF_E.1
N$28
  Top 0.305: R_LF_E.2 13.26,37.99 LF_IR_EMIT.K
N$29
  Top 0.254: U$9.1C 22.1,35.99
  Top 0.305: D_B.A 36.91,35.82 SPK1.+ 35.24,34.53 34.62,33.91 23.19,33.91 22.05,35.05 22.05,36.02 U$9.1C
N$31  (via drill 0.6)
  Top 0.305: PWR_SWITCH.2 87.85,53.07 85.93,54.99 v79.83,54.99
  Bottom 0.305: v79.83,54.99 72.97,54.99 69.16,51.18 69.16,48.46 U$7.+
N$35
  Top 0.305: G1.14 91.97,43.51 94.18,45.72 95.06,45.72 C2_G.1
N$40
  Top 0.305: LED1.A 43.17,30.54 R_LED1.1
N$41
  Top 0.305: LED2.A 43.26,33.89 R_LED2.1
N$42
  Top 0.305: LED3.A 43.45,37.37 R_LED3.1
N$43
  Top 0.305: LED4.A 43.36,40.59 R_LED4.1
N$44
  Top 0.305: LED5.A 43.55,43.69 R_LED5.1
N$56  (via drill 0.6)
  Top 0.305: U$3.73 73.49,45.46 73.1,45.85 v71.45,45.85 | v75.9,51.05 75.9,52.7 C_VCAP2.1
  Bottom 0.305: v71.45,45.85 71.45,46.61 v75.9,51.05
N$57
  Top 0.305: C_VCAP1.1 82.26,51.05 88.34,51.05 88.6,50.8 88.6,44.2 88.21,43.81 88.21,41.91 88.2,41.93 U$3.48
R_EMITTER  (via drill 0.6)
  Top 0.305: U$9.4B U$9.3B 32.56,37.36 v32.59,37.34 | U$3.98 60.6,31.93 57.1,35.43 v56.97,35.43
  Bottom 0.305: v32.59,37.34 55.07,37.34 v56.97,35.43
RENCA  (via drill 0.6)
  Top 0.305: U$3.91 77.29,35.43 86.82,44.96 v86.87,48.69
  Bottom 0.305: R_MOT.1 84.6,56.06 86.84,54.25 v86.87,48.69
RENCB  (via drill 0.6)
  Top 0.305: U$3.90 77.03,35.93 86.18,45.08 86.18,46.74 85.29,47.62 85.29,48.77 v85.8,49.28
  Bottom 0.305: R_MOT.2 82.06,56.95 84.53,54.48 85.29,54.48 86.33,53.64 86.33,49.66 v85.8,49.28
RESET  (via drill 0.6)
  Top 0.305: RST.1 29.22,28.22 R_RST_UP1.1 C_RESET1.1 36.23,30.1 v37.8,30.1 | U$3.14 78.99,26.84 v78.69,26.54
  Bottom 0.305: v78.69,26.54 78.69,19.56 75.39,16.26 64.34,16.26 58.37,22.22 45.67,22.22 v37.8,30.1
RF_EMITTER  (via drill 0.6)
  Top 0.305: U$3.97 61.5,32.43 57.1,36.83 55.32,36.83 v54.56,36.07 | v33.73,36.07 32.97,36.07 32.97,35.18 32.59,34.8 31.19,34.8 30.94,35.05 30.94,36.58 30.81,36.7 27.71,36.7 U$9.2B
  Bottom 0.305: v54.56,36.07 v33.73,36.07
RF_REC  (via drill 0.6)
  Top 0.305: RF_REC.E 12.16,50.56 R_RF_R.2 | U$3.34 84.78,34.93 83.64,36.07 v83.64,39.37
  Bottom 0.305: v83.64,39.37 83.64,43.05 86.94,46.36 86.94,46.86 84.28,48.39 84.15,50.93 83.39,54.74 80.85,57.53 75.39,62.99 34.87,62.99 33.99,63.88 13.03,63.88 6.55,57.4 6.55,51.47 RF_REC.E
RIGHT_REC
  Top 0.305: R_REC.E 35.76,60.03 R_R_R.2 37.97,59.86 41.22,63.12 61.67,63.12 65.1,59.69 65.1,58.93 67.01,57.02 75.01,57.02 75.64,56.39 79.2,56.39 79.71,55.88 86.31,55.88 88.6,53.59 88.72,53.59 89.23,53.09 89.23,43.56 88.72,43.05 88.72,36.7 87.45,35.43 U$3.35
RPWMA  (via drill 0.6)
  Top 0.305: R1_RMOT.2 91.5,62.54 MOS_R.IN_A 91.15,61.84 92.28,60.71 93.42,60.71 v93.8,60.33 | v100.15,27.56 98.5,27.56 97.23,26.29 85.29,26.29 84.02,27.56 84.02,29.14 U$3.24
  Bottom 0.305: v93.8,60.33 97.87,60.33 101.93,56.26 101.93,29.34 v100.15,27.56
RPWMB  (via drill 0.6)
  Top 0.305: R2_RMOT.2 89.32,63.46 88.72,62.86 88.72,62.31 MOS_R.IN_B 88.61,61.71 89.99,60.33 v90.42,60.35 | v96.34,27.18 95.96,26.92 86.74,26.92 U$3.25
  Bottom 0.305: v90.42,60.35 90.48,59.36 92.53,57.61 98.37,57.53 100.66,55.24 100.66,31.62 v96.34,27.18
RX
  Top 0.305: U$3.69 75.51,44.7 75.51,46.48 74.75,47.24 73.48,47.24 71.2,49.53 71.2,52.32 69.93,53.59 28.29,53.59 PROG_HEAD.5
SWCLK  (via drill 0.6)
  Top 0.305: v66.12,42.8 66.25,42.93 U$3.76
  Bottom 0.305: PROG_HEAD.6 25.51,50.55 27.64,50.55 32.84,45.34 61.93,45.34 64.47,42.8 v66.12,42.8
SWDIO
  Top 0.305: PROG_HEAD.8 25.48,53.12 25.48,50.93 25.86,50.55 31.7,50.55 33.6,52.45 69.67,52.45 70.31,51.82 70.31,48.89 72.59,46.61 73.99,46.61 U$3.72
TX
  Top 0.305: PROG_HEAD.7 27.15,54.99 64.85,54.99 65.99,56.13 71.07,56.13 71.96,55.24 71.96,49.78 73.48,48.13 75.77,48.13 75.99,47.91 U$3.68
V_BAT  (via drill 0.6)
  Top 0.305: C2_LMOT.2 96.94,15.09 C1_LMOT.2 96.83,15.35 99.01,17.53 101.55,17.53 102.06,18.03 102.06,25.65 101.68,26.04 | 101.68,26.04 101.17,26.54 99.39,26.54 98.76,25.91 98.76,23.95 HB_L.P1S/PS2 98.72,24.29 97.49,25.53 92.53,25.53 92.15,25.15 92.15,23.13 MOS_L.VDD | C2_RMOT.2 98.71,63.49 C1_RMOT.2 95.82,64.25 96.72,65.15 99.64,65.15 101.04,63.75 101.04,60.2 100.28,59.44 97.1,59.44 96.98,59.31 96.34,59.31 96.34,57.77 HB_R.P1S/PS2 96.37,56.03 v96.34,56.01 | v89.87,54.74 MOS_R.VDD 89.88,56.76 88.85,57.78 86.94,57.78 85.42,59.31 78.98,59.31 C_VBAT2.1 77.11,57.88 C_VBAT1.1 73.42,60.02 50LDO.IN2 50LDO.IN1 | PWR_SWITCH.3 92.87,49.91 100.79,49.91 102.31,48.39 102.31,26.92 101.68,26.29 101.68,26.04
  Bottom 0.305: v96.34,56.01 96.34,55.24 95.35,53.67 91.26,53.64 | 91.26,53.64 91.29,54.74 v89.87,54.74 | PWR_SWITCH.3 90.37,53.21 91.26,53.64

## Text on the board
tValues: Should have used an Arduino | Should have used an Arduino